# Altium PCB PCB Deck - Crazyflie.pcbdoc
Units mil, origin at the board's own origin, x right, y up, seen from the top; angles counter-clockwise.
Board outline 2517.43 x 2318.5 mil, 2 copper layers (Top Layer, Bottom Layer); 6 components, 4 nets, 36 pads, 0 vias.
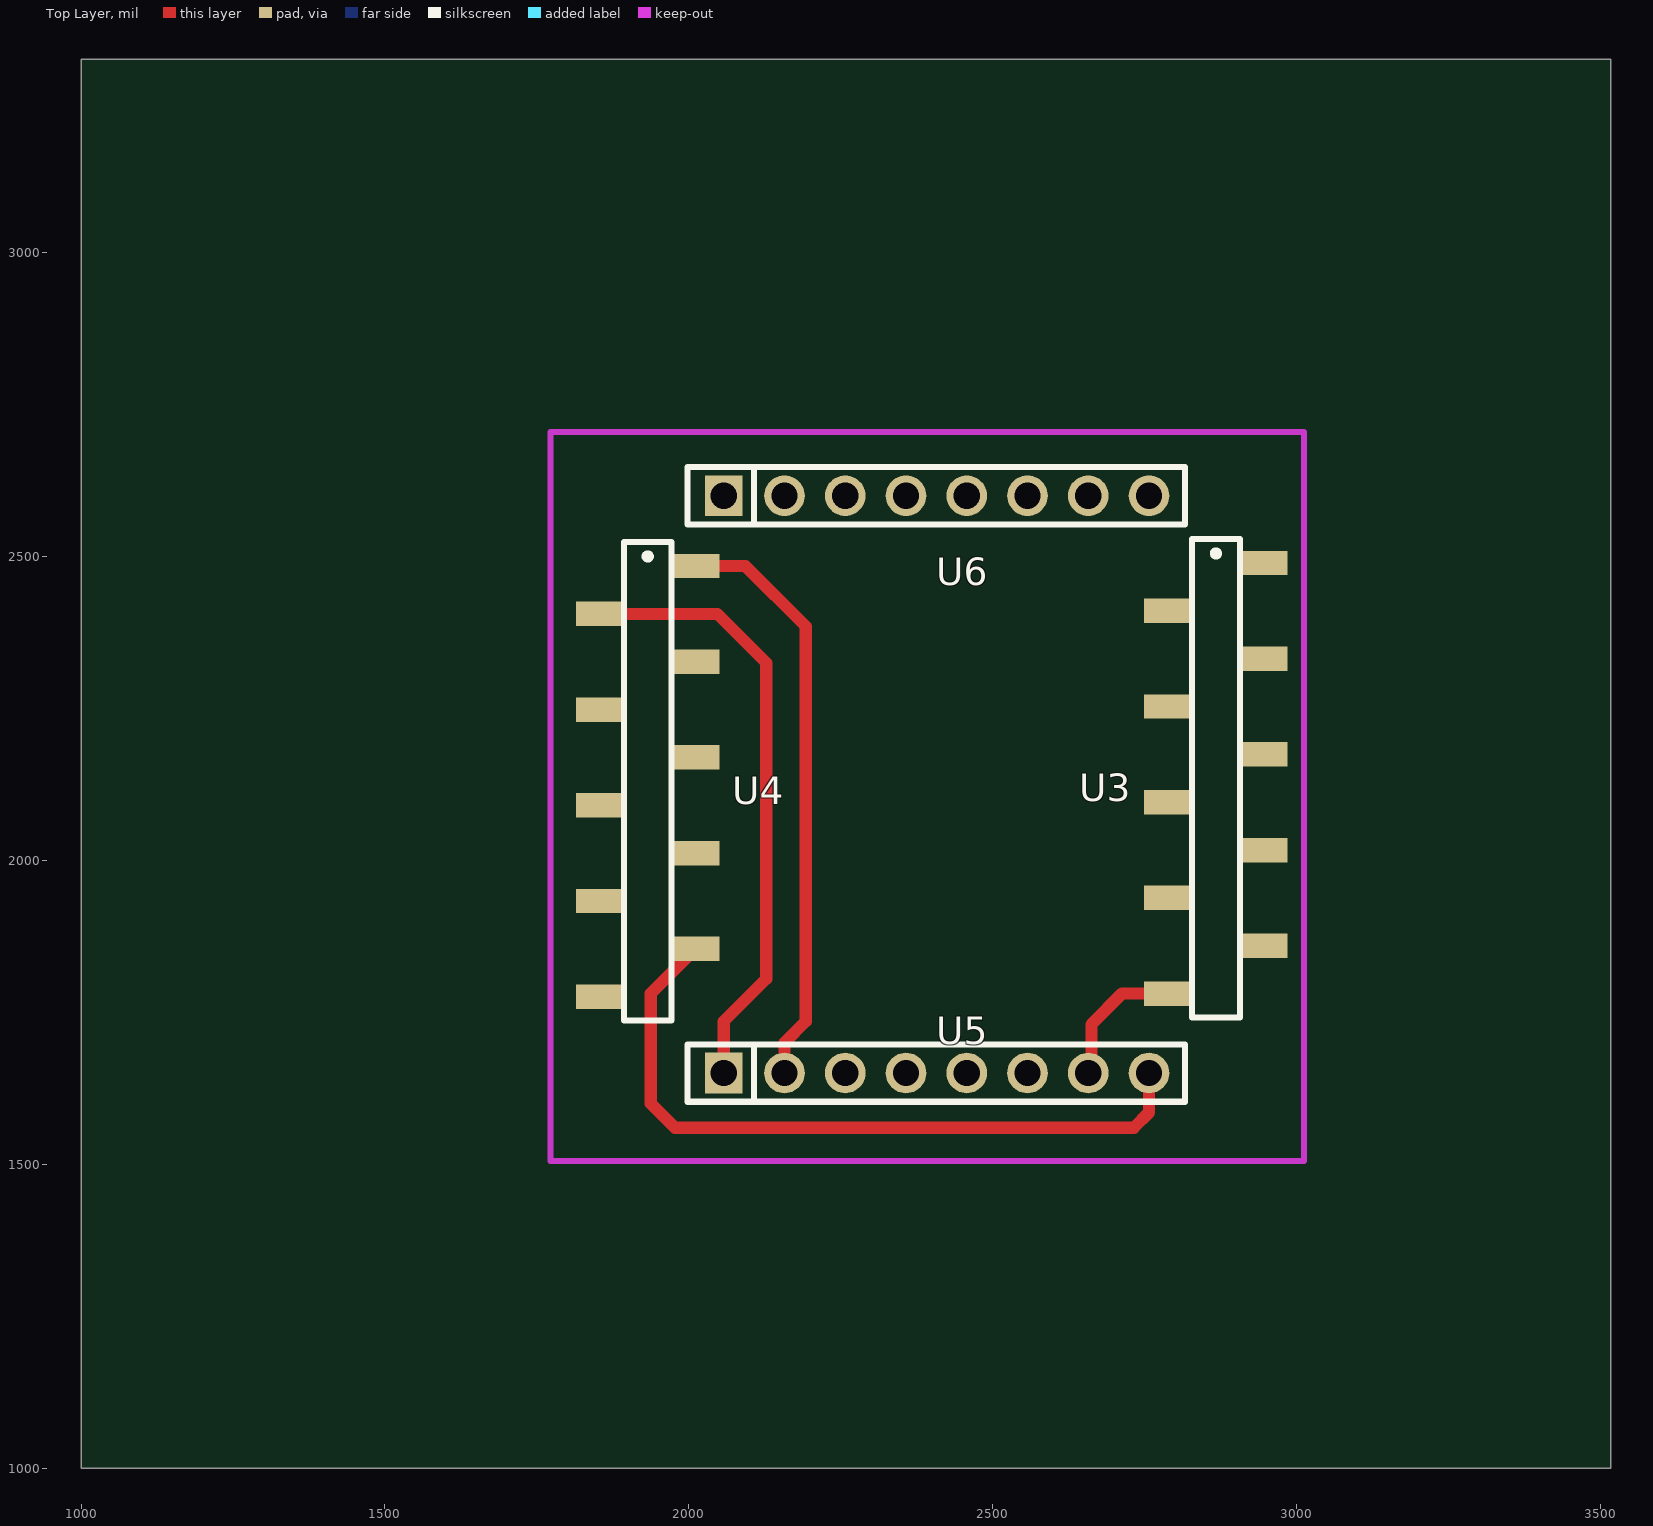
[diagram p0: Top Layer view]
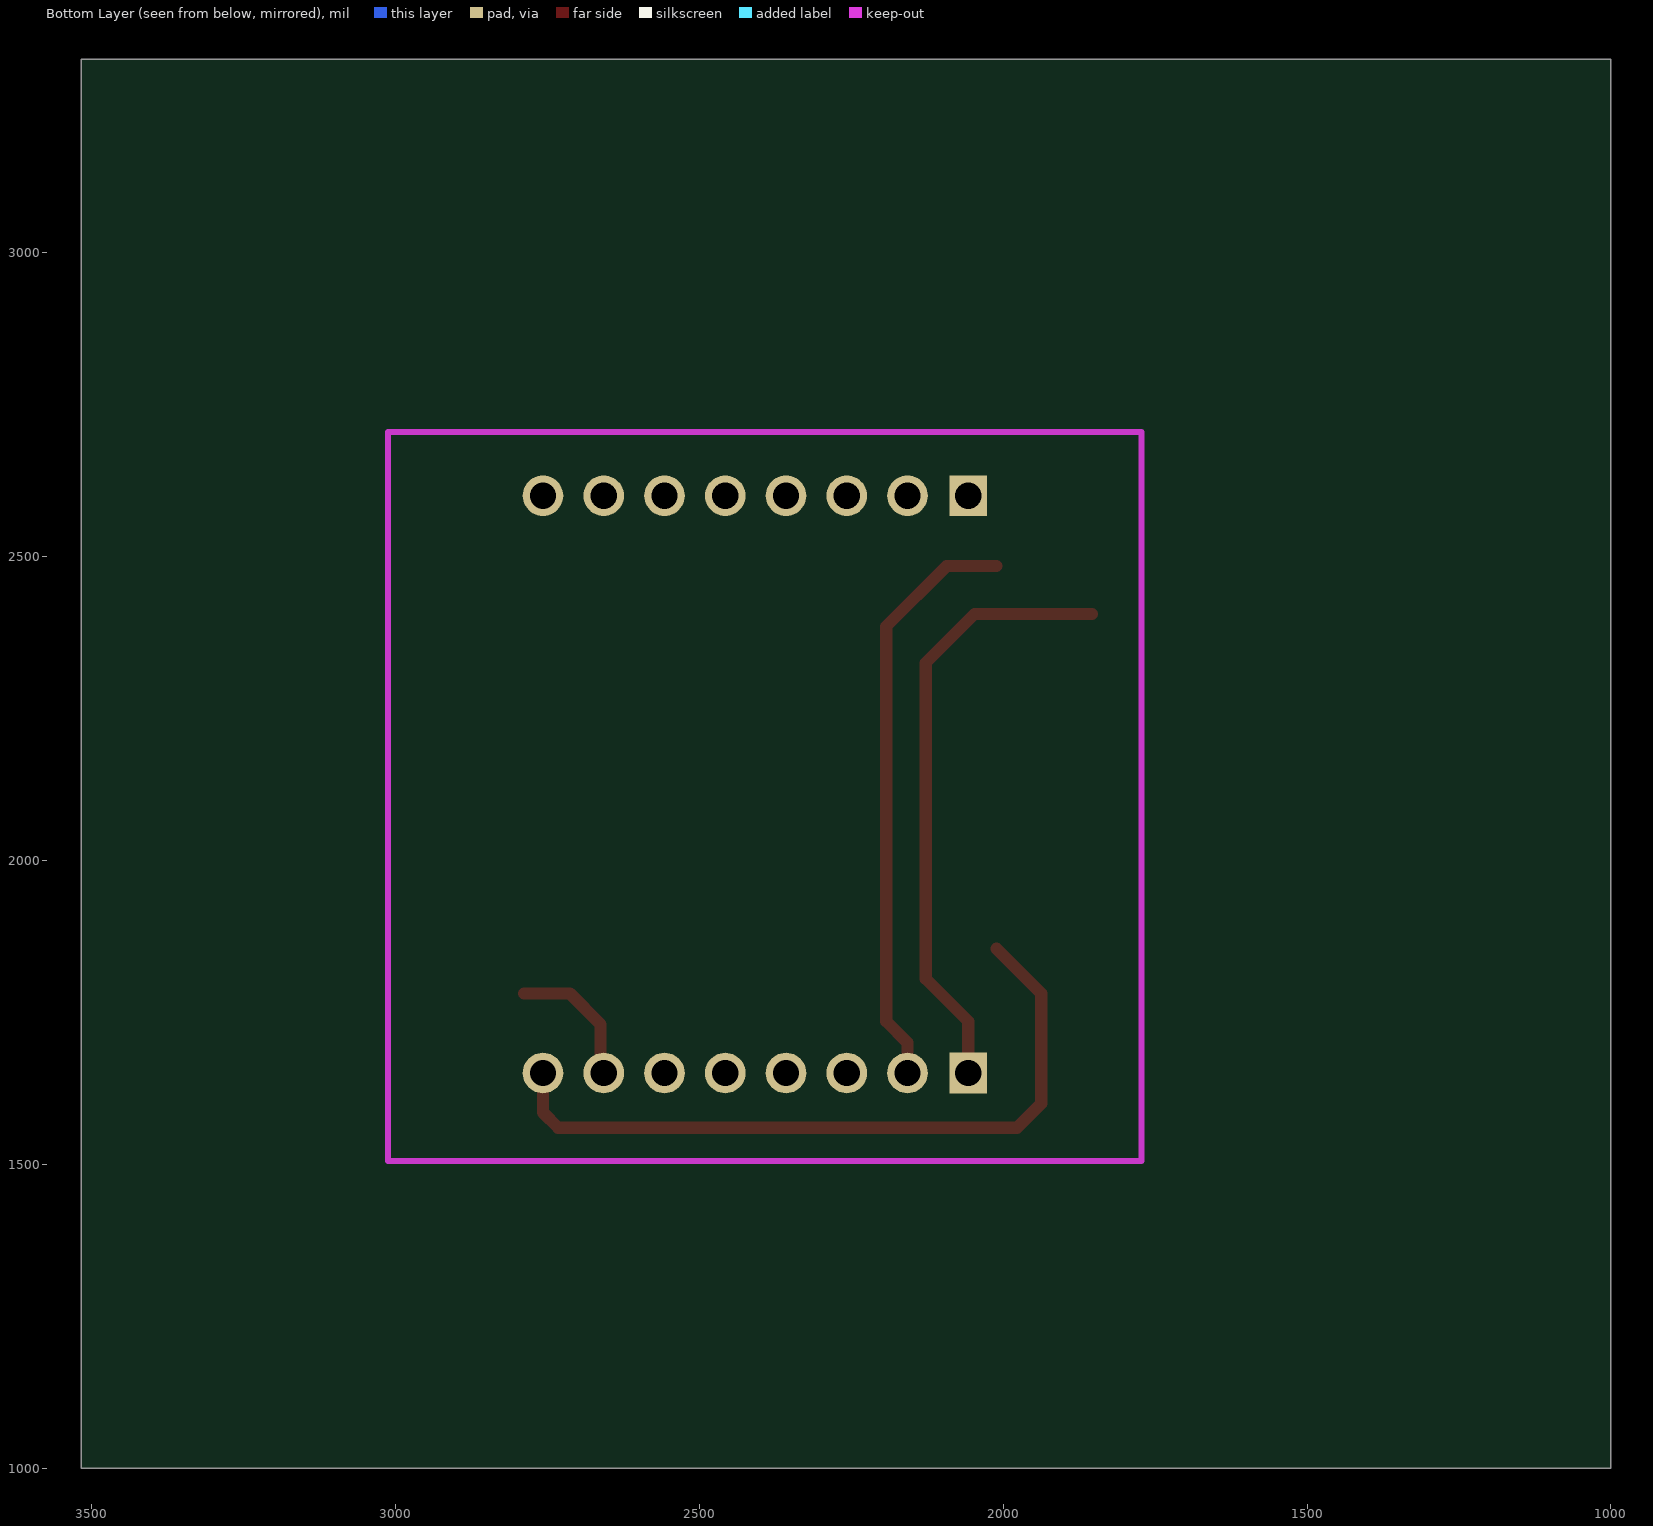
[diagram p1: Bottom Layer view, seen from below]

## Layer stack, top to bottom
Top Layer: signal copper (thickness not stored)
Dielectric: dielectric 12.6, FR-4, Dk 4.8
Bottom Layer: signal copper (thickness not stored)

## Board outline
3517.43,1000 1000,1000 1000,3318.5 3517.43,3318.5

## Components (designator, comment, footprint, x,y, rotation, side; value= is the part's Value field where it differs from the comment)
U3 "MALE HEADER 10 PINS - LEFT" "MALE HEADER 10 PINS" 2867.42,2135 r0 top
U4 "MALE HEADER 10 PINS - RIGHT" "MALE HEADER 10 PINS" 1932.43,2130 r0 top
U5 "8 PINS - LEFT" HDR-TH_8P-P2.54-V-F 2407.43,1650 r0 top
U6 "8 PINS - RIGHT" HDR-TH_8P-P2.54-V-F 2407.43,2600 r0 top
? "" ? 1779.71,2125 r0 top
? "" ? 2321.19,2611.05 r0 top

## Footprints (in the part's own frame and the unit in brackets; to place one, negate y for a bottom-side part, rotate by r counter-clockwise, add the part's x,y. Pads: shape width x height; smd on the part's side, far side on the other; paste and mask are expansions set on the pad)
HDR-TH_8P-P2.54-V-F [mm]
  rect 1.575x1.7 hole 1.1: 1(-8.89,0)
  round 1.7 hole 1.1: 2(-6.35,0) 3(-3.81,0) 4(-1.27,0) 5(1.27,0) 6(3.81,0) 7(6.35,0) 8(8.89,0)
  silkscreen extent -10.4,-1.2 10.4,1.2
"MALE HEADER 10 PINS" [mm]
  rect 2x1.02 smd: 1(2,9) 2(-2,7) 3(2,5) 4(-2,3) 5(2,1) 6(-2,-1) 7(2,-3) 8(-2,-5) 9(2,-7) 10(-2,-9)
  silkscreen extent -1,-10 1,10
? [mil]

## Nets (pads, with @x,y where several pads share a name; then routed paths per layer and width w, separated by ;. In a path a pad name is that pad's centre, name@x,y a point inside that pad or via, vN(x,y) a via of type N, cw(c..) or ccw(c..) an arc to the next point about the centre after c; other vN are vias at no path point)
GND: U3.10 U5.7 | length 229.3
  Top Layer w20: U5.7 2662.42,1655 2662.42,1730 2713.09,1780.67 U3.10
RX: U4.2 U5.1 | length 1011.1
  Top Layer w20: U4.2 2046.84,2405.59 2127.43,2325 2127.43,1805 2057.43,1735 U5.1
TX: U4.1 U5.2 | length 971.9
  Top Layer w20: U4.1 2093.09,2484.33 2192.43,2385 2192.43,1735 2157.42,1700 U5.2
VCOM: U4.9 U5.8 | length 1196.9
  Top Layer w20: U4.9@2011.13,1854.4 1937.43,1780.7 1937.43,1600 1977.43,1560 2732.43,1560 2757.43,1585 U5.8
pads on no net: U3.1 U3.2 U3.3 U3.4 U3.5 U3.6 U3.7 U3.8 U3.9 U4.3 U4.4 U4.5 U4.6 U4.7 U4.8 U4.10 U5.3 U5.4 U5.5 U5.6 U6.1 U6.2 U6.3 U6.4 U6.5 U6.6 U6.7 U6.8